# Altium PCB MBHP_CORE_LPC176x-edit.PcbDoc (part 1 of 2)
Units mil, origin at the board's own origin, x right, y up, seen from the top; angles counter-clockwise.
Board outline 4724.41 x 3937.01 mil, 2 copper layers (Top Layer, Bottom Layer), stack 61.855 mil thick; 70 components, 109 nets, 446 pads, 2 vias.
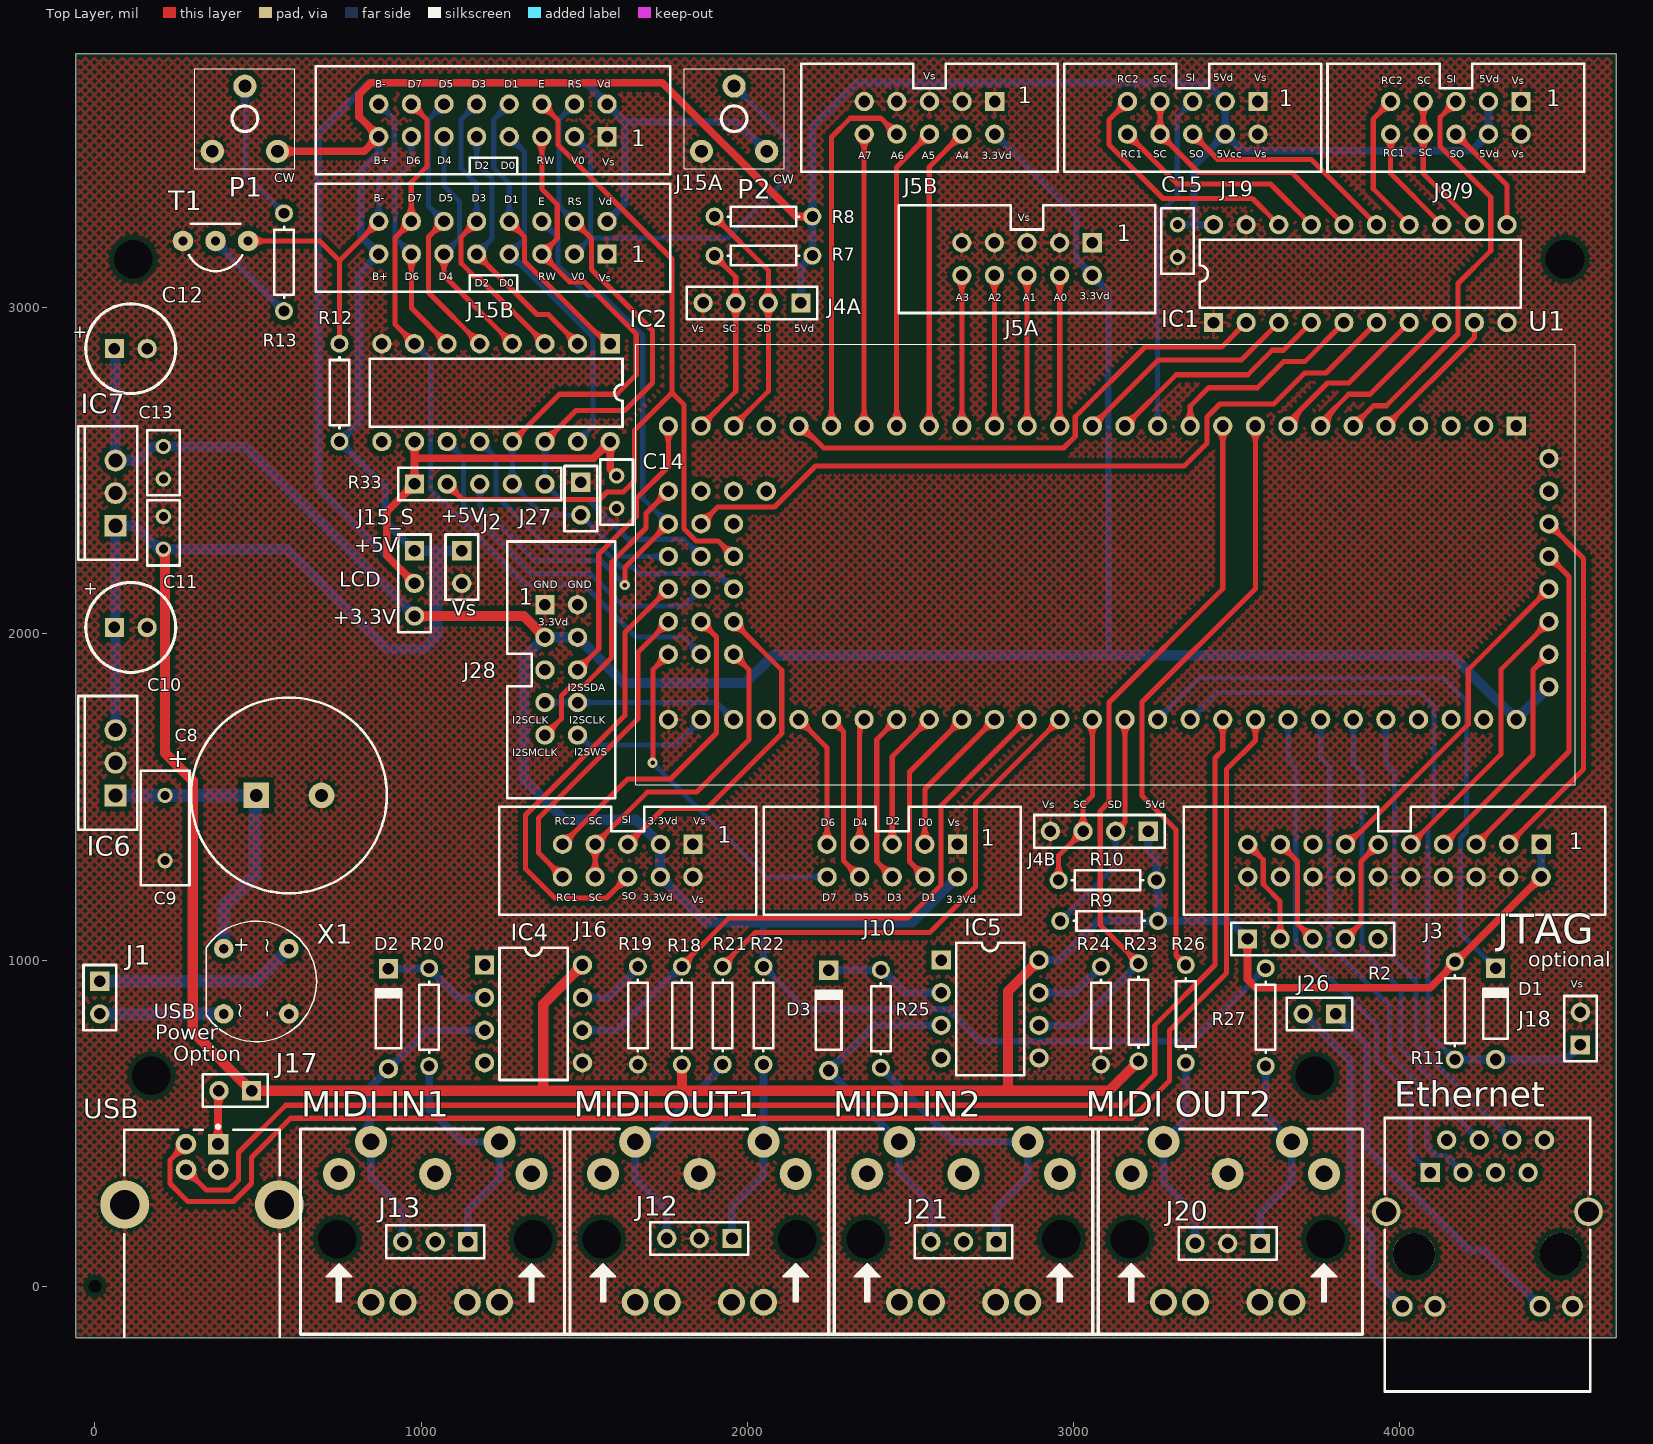
[diagram p0: Top Layer view]
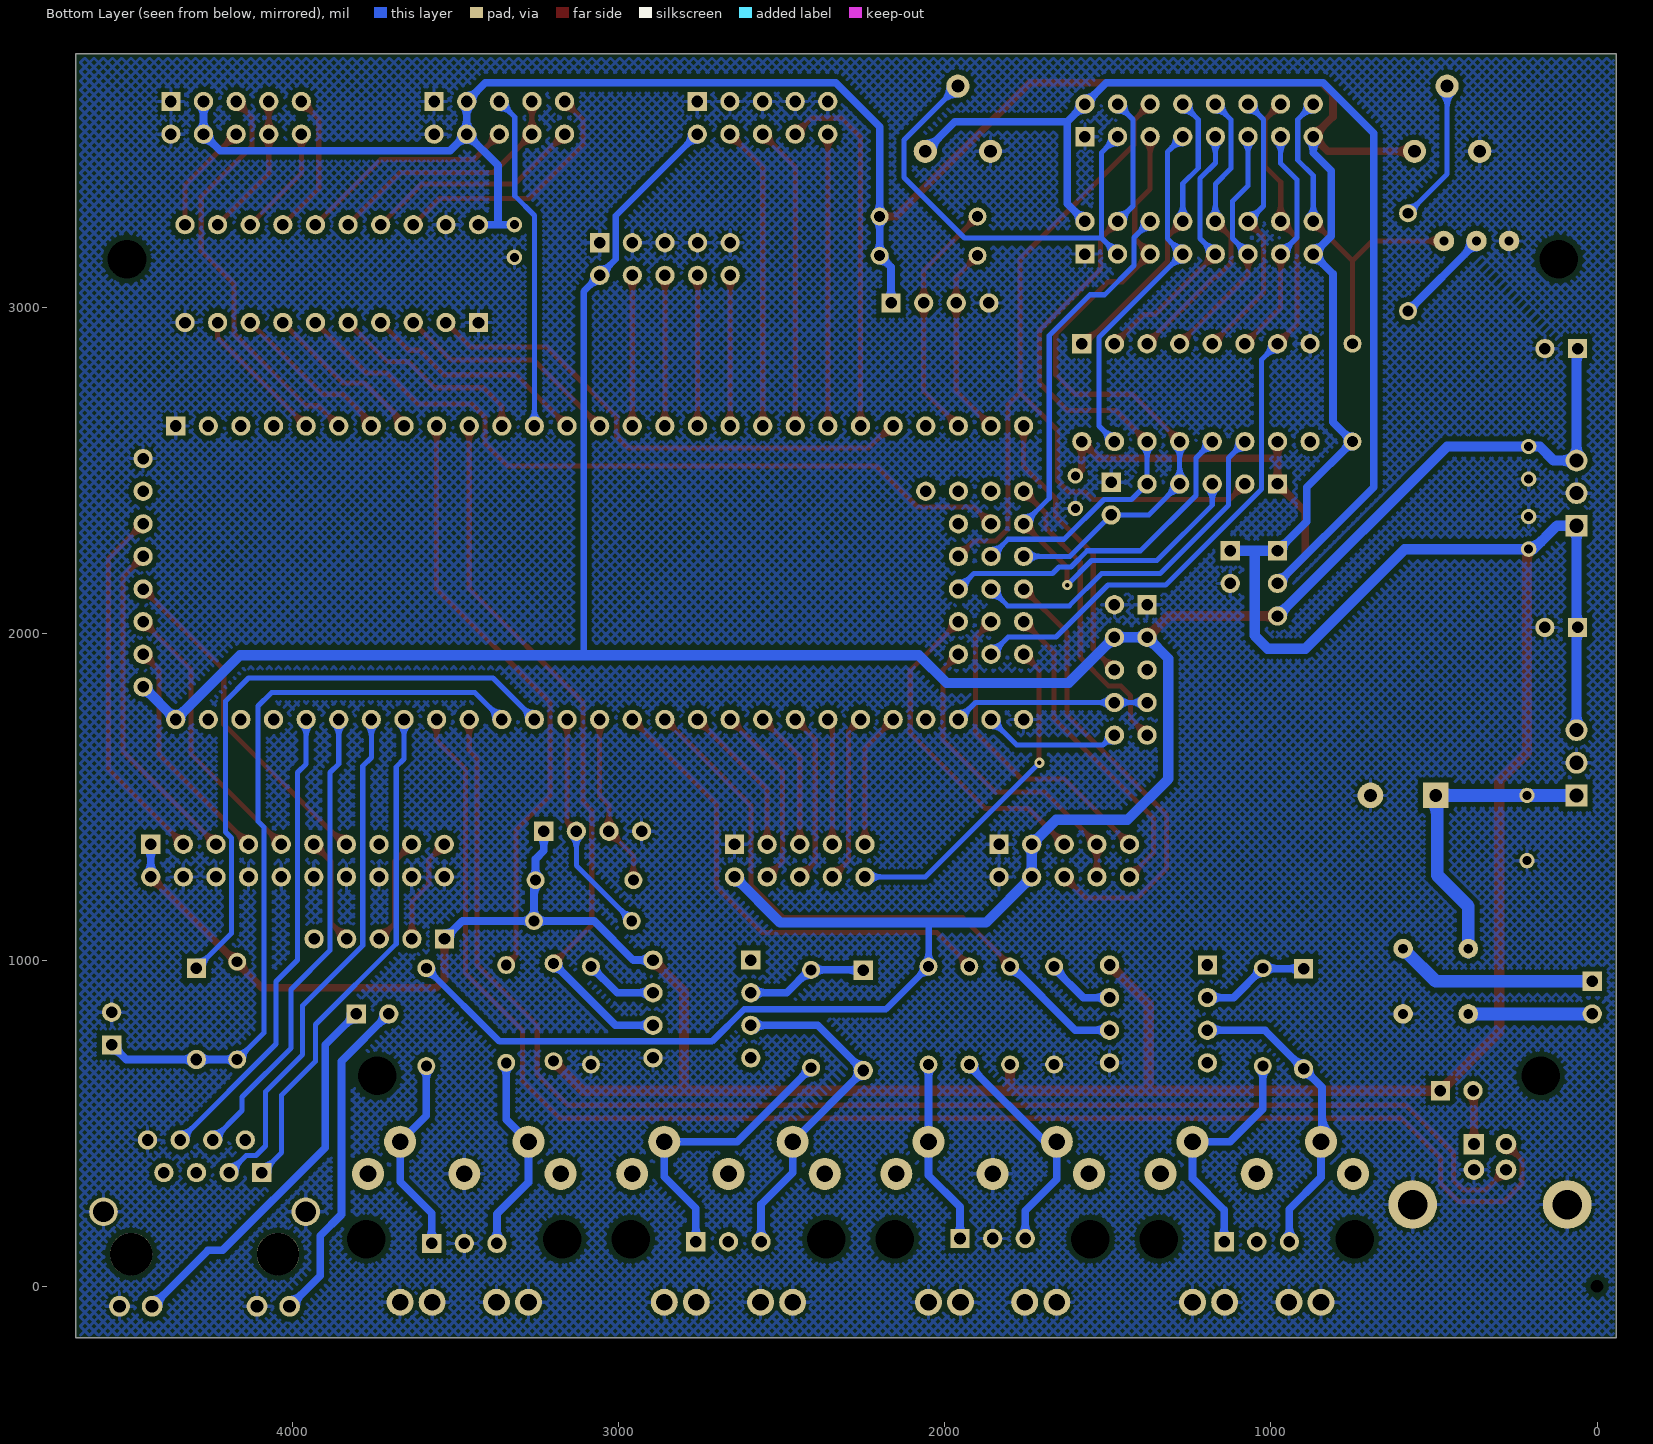
[diagram p1: Bottom Layer view, seen from below]

## Layer stack, top to bottom
Top Solder: solder mask 0.4, Solder Resist, Dk 3.5
Top Layer: signal copper 1.4
Dielectric1: core 59.0551, FR-4, Dk 4.8
Bottom Layer: signal copper 1.4
Bottom Solder: solder mask 0.4, Solder Resist, Dk 3.5

## Board outline
-59.06,-157.48 4665.35,-157.48 4665.35,3779.53 -59.06,3779.53

## Design rules (kind name [scope] priority, off if disabled: settings)
Clearance "Polygon Clearance" [InPolygon] p1: gap=15
ComponentClearance [All] p1: gap=0 collisioncheckmode=3 verticalgap=0 showdistances=FALSE
Height [All] p1: minheight=0 maxheight=1968.5 prefheight=500
HoleSize [All] p1: absolutevalues=TRUE maxlimit=275.59 minlimit=1 maxpercent=80.000 minpercent=20.000
MinimumSolderMaskSliver [All] p1: minsoldermaskwidth=7.09
PolygonConnect [All] p1: connectstyle=Relief reliefconductorwidth=10 reliefentries=4 polygonreliefangle="90 Angle" airgapwidth=10
RoomDefinition MBHP_CORE_LPC17xx [InComponentClass('MBHP_CORE_LPC17xx')] p1: confinementstyle=ConfineIn formatcopy=TRUE lockcomponents=TRUE outline -770,-750 5415,-750 5415,3915 -770,3915
RoutingVias [All] p1: holewidth=13.78 width=31.5 viastyle="Through Hole" minholewidth=11.81 minwidth=27.56 maxholewidth=28 maxwidth=50
SilkToSilkClearance [All] p1: silktosilkclearance=3.94
SilkToSolderMaskClearance SilkscreenOverComponentPads [IsPad] p1: minsilkscreentomaskgap=0 clearancetoexposedcopper=TRUE
SolderMaskExpansion [All] p1: expansion=4
Width [All] p1: maxlimit=157.48 minlimit=9.06 preferedwidth=23.62 minimp=50.000000 maximp=50.000000 favimp=50.000000
24 further rules are at their usual default settings.

## Components (designator, comment, footprint, x,y, rotation, side; value= is the part's Value field where it differs from the comment)
C8 "Cap Pol2" RB5-15 595,1505 r180 top
C9 "Cap2" RAD-0.2 215,1405 r270 top
C10 "Cap Pol2" RB2.54-7 110,2020 r0 top
C11 "Cap2" RAD-0.1 210,2310 r90 top
C12 "Cap Pol2" RB2.54-7 110,2875 r0 top
C13 "Cap2" RAD-0.1 210,2525 r270 top
C14 "Cap2" RAD-0.1 1600,2435 r270 top
C15 "Cap2" RAD-0.1 3320,3205 r270 top
D1 "Diode 1N4148" DO-35 4295,835 r90 top
D2 "1N4148" DO-35A 900,820 r90 top
D3 "1N4148" DO-35A 2250,815 r90 top
Ethernet "RJ45_LEDS" CON_RJ45_RA_LEDS 4269.88,98.43 r0 top
IC1 "SN74HCT541N" N020 3880,3105 r0 top
IC2 "SN74HTC595N" N016 1230,2740 r180 top
IC4 "6N138" DIP-8 1345,835 r270 top
IC5 "6N138" DIP-8 2745,850 r270 top
IC6 "7805" TO220V 62.99,1605 r90 top
IC7 "LF33" TO220V 62.99,2431.77 r90 top
J1 "Power" HDR1X2#1 15,935 r270 top
J2 "" HDR1X2#1 1125,2255 r270 top
J3 "JTAG" "HDR2X10 - big" 3985,1305 r180 top
J4A "IIC1" HDR1X4 2165,3015 r180 top
J4B "IIC2" HDR1X4 3230,1395 r180 top
J5A "Header 5X2" "HDR2X5 - big" 2858.27,3149.61 r180 top
J5B "Header 5X2" "HDR2X5 - big" 2559.06,3582.68 r180 top
J8/9 "Header 5X2" "HDR2X5 - big" 4173.23,3582.68 r180 top
J10 "Header 5X2" "HDR2X5 - big" 2445,1305 r180 top
J12 "Header 3" HDR1X3 1853.54,146.34 r180 top
J13 "Header 3" HDR1X3 1043.54,136.34 r180 top
J15_S "Header 3" HDR1X3 980,2155 r270 top
J15A "LCD1" HDR2X8 1220.47,3575 r0 top
J15B "LCD2" HDR2X8 1220.47,3215 r0 top
J16 "Header 5X2" "HDR2X5 - big" 1633.86,1305 r180 top
J17 "Header 2" HDR1X2#2 480,600 r180 top
J18 "CAN" HDR1X2#1 4555,740 r90 top
J19 "Header 5X2" "HDR2X5 - big" 3366.14,3582.68 r180 top
J20 "Header 3" HDR1X3 3473.54,131.34 r180 top
J21 "Header 3" HDR1X3 2663.54,136.34 r180 top
J26 "LEDs" HDR1X2#1 3805,835 r180 top
J27 "BSL HOLD" HDR1X2#1 1490,2465 r270 top
J28 "Header 5X2" "HDR2X5 - big" 1430,1889.76 r270 top
"MIDI IN1" "MAB-5-SH" MAB-5-SH-2 1043.54,196.85 r0 top
"MIDI IN2" "MAB-5-SH" MAB-5-SH-2 2663.54,196.85 r0 top
"MIDI OUT1" "MAB-5-SH" MAB-5-SH-2 1853.54,196.85 r0 top
"MIDI OUT2" "MAB-5-SH" MAB-5-SH-2 3473.54,196.85 r0 top
P1 "Luminance" CA6V 460,3580 r0 top
P2 "Contrast" CA6V 1960,3580 r0 top
R2 "Resistor Network5" RN1X5 3734.25,1065 r0 top
R7 "Res1 US" AXIAL-0.3 2050,3160 r180 top
R8 "Res1 US" AXIAL-0.3 2050,3280 r180 top
R9 "Res1 US" AXIAL-0.3 3110,1120 r180 top
R10 "Res1 US" AXIAL-0.3 3105,1245 r180 top
R11 "Res1 US" AXIAL-0.3 4170,845 r90 top
R12 "Res1 US" AXIAL-0.3 750,2740 r270 top
R13 "Res1 US" AXIAL-0.3 580,3140 r270 top
R18 "Res1 US" AXIAL-0.3 1800,830 r270 top
R19 "Res1 US" AXIAL-0.3 1665,830 r90 top
R20 "Res1 US" AXIAL-0.3 1025,825 r270 top
R21 "Res1 US" AXIAL-0.3 1925,830 r270 top
R22 "Res1 US" AXIAL-0.3 2050,830 r90 top
R23 "Res1 US" AXIAL-0.3 3200,840 r270 top
R24 "Res1 US" AXIAL-0.3 3085,830 r90 top
R25 "Res1 US" AXIAL-0.3 2410,820 r270 top
R26 "Res1 US" AXIAL-0.3 3345,835 r270 top
R27 "Res1 US" AXIAL-0.3 3590,825 r90 top
R33 "Resistor Network5" RN1X5 1180,2460 r0 top
T1 "BC337" "TO-92 Wide" 370,3205 r90 top
U1 "LPCXpresso1769" "LPCXPRESSO1769 - SMALL" 4358.54,2637.8 r180 top
USB "1-1470156-1" 1-1470156 328.54,-155 r270 top
X1 "Bridge Rectifier" B40C800 495,935 r90 top

## Footprints (in the part's own frame and the unit in brackets; to place one, negate y for a bottom-side part, rotate by r counter-clockwise, add the part's x,y. Pads: shape width x height; smd on the part's side, far side on the other; paste and mask are expansions set on the pad)
1-1470156 [mm] "Connector; USB1.1, Type B, Thru-Hole; 4 Position; Right Angle"
  rect 1.6x1.6 hole 0.92: 1(-15.01,1.25)
  round 1.6 hole 0.92: 2(-15.01,-1.25) 3(-13.01,-1.25) 4(-13.01,1.25)
  round 3.8 hole 2.3: 5(-10.3,6.02) 6(-10.3,-6.02)
  silkscreen extent -16.48,-6.05 -0.02,6.05, body extent -16.07,-6.05 0,6.02, height 12
AXIAL-0.3 [mm] "Resistor; 2 Leads"
  round 1.4 hole 0.85: 1(-3.81,0) 2(3.81,0)
  silkscreen extent -2.77,-0.76 2.77,0.76, body extent -3.4,-1.33 3.6,1.27, height 2.59
B40C800 [mil] "S1B, 1N Package, Shindengen"
  round 60 hole 30: 1(100,100) 2(-100,100) 3(100,-100) 4(-100,-100)
  silkscreen extent -185,-185 185,154, body extent -186,-185 185,154, height 276
CA6V [mm] "PT 15 NV"
  round 1.8 hole 1: 1(2.54,-2.54) 2(-2.54,-2.54) 3(0,2.54)
  silkscreen extent -3.9,-3.9 3.9,3.9, body extent -3.9,-3.9 3.9,3.9, height 4
CON_RJ45_RA_LEDS [mm]
  rect 1.5x1.5 hole 0.9: 1(-4.445,6.35)
  round 1.5 hole 0.9: 2(-3.175,8.89) 3(-1.905,6.35) 4(-0.635,8.89) 5(0.635,6.35) 6(1.905,8.89) 7(3.175,6.35)
  round 1.5 hole 0.9 mask+0: 8(4.445,8.89)
  round 1.62 hole 1: 9(-6.625,-4.06) 11(4.085,-4.06) 12(6.625,-4.06)
  round 1.62 hole 1 mask+0: 10(-4.085,-4.06)
  round 2.23 hole 1.6: MH1(-7.875,3.3) MH2(7.875,3.3)
  round 3.3 hole 3.3 unplated: MH3(-5.715,0) MH4(5.715,0)
  silkscreen extent -8,-10.7 8,10.6, body extent -7.9,-10.71 7.97,10.6, height 13.14
DIP-8 [mm] "DIP; 8 Leads; Row Spacing 7.62 mm; Pitch 2.54 mm"
  rect 1.5x1.5 hole 0.9: 1(-3.81,-3.81)
  round 1.5 hole 0.9: 2(-1.27,-3.81) 3(1.27,-3.81) 4(3.81,-3.81) 5(3.81,3.81) 6(1.27,3.81) 7(-1.27,3.81) 8(-3.81,3.81)
  silkscreen extent -5.15,-2.65 5.15,2.65, body extent -5.09,-2.69 5.2,2.65, height 3.1
DO-35 [mm] "Diode, Axial; Body 3.8 x 1.9 mm (LxDia. max), Lead Dia. 0.53 mm (max)"
  round 1.5 hole 0.9: 1(-3.55,0)
  rect 1.5x1.5 hole 0.9: 2(3.55,0)
  silkscreen extent -1.95,-0.95 2.05,0.95, body extent -2.52,-1.36 2.48,1.24, height 2.59
DO-35A [mm] "Diode, Axial; Body 4.6 x 1.9 mm (LxDia. max), Lead Dia. 0.53 mm (max)"
  round 1.5 hole 0.9: 1(-3.9,0)
  rect 1.5x1.5 hole 0.9: 2(3.9,0)
  silkscreen extent -2.3,-1 2.4,1, body extent -2.63,-1.29 2.37,1.3, height 2.59
HDR1X2#1 [mm]
  rect 1.5x1.5 hole 0.9: 1(0,0)
  round 1.5 hole 0.9: 2(2.54,0)
  silkscreen extent -1.27,-1.27 3.81,1.27, body extent -1.27,-1.27 3.81,1.27, height 8.41
HDR1X2#2 [mm]
  rect 1.5x1.5 hole 0.9: 1(-0.01,0.007)
  round 1.5 hole 0.9: 2(2.53,0.007)
  silkscreen extent -1.28,-1.26 3.8,1.28, body extent -1.28,-1.26 3.8,1.28, height 8.41
HDR1X3 [mm] "Connector; Header; 3 Position"
  rect 1.5x1.5 hole 0.9: 1(-2.54,0)
  round 1.5 hole 0.9: 2(0,0) 3(2.54,0)
  silkscreen extent -3.81,-1.27 3.81,1.27
HDR1X4 [mm] "Connector; Header; 4 Position"
  rect 1.5x1.5 hole 0.9: 1(0,0)
  round 1.5 hole 0.9: 2(2.54,0) 3(5.08,0) 4(7.62,0)
  silkscreen extent -1.27,-1.27 8.89,1.27, body extent -1.27,-1.32 8.91,1.22, height 8.41
"HDR2X5 - big" [mm] "Connector; Header; 5x2 Position"
  rect 1.5x1.5 hole 0.9: 1(-5.08,-1.27)
  round 1.5 hole 0.9: 2(-5.08,1.27) 3(-2.54,-1.27) 4(-2.54,1.27) 5(0,-1.27) 6(0,1.27) 7(2.54,-1.27) 8(2.54,1.27) 9(5.08,-1.27) 10(5.08,1.27)
  silkscreen extent -10,-4.2 10,4.2, body extent -9.97,-4.25 10.02,4.18, height 10
HDR2X8 [mm] "Connector; Header; 8x2 Position"
  round 1.5 hole 0.9: 1(-8.89,-1.27) 2(-8.89,1.27) 3(-6.35,-1.27) 4(-6.35,1.27) 5(-3.81,-1.27) 6(-3.81,1.27) 7(-1.27,-1.27) 8(-1.27,1.27) 9(1.27,-1.27) 10(1.27,1.27) 11(3.81,-1.27) 12(3.81,1.27) 13(6.35,-1.27) 14(6.35,1.27) 16(8.89,1.27)
  rect 1.5x1.5 hole 0.9: 15(8.89,-1.27)
  silkscreen extent -13.8,-4.2 13.8,4.2, body extent -10.1,-2.49 10.23,2.59, height 8.41
"HDR2X10 - big" [mm] "Connector; Header; 10x2 Position"
  rect 1.5x1.5 hole 0.9: 1(-11.43,-1.27)
  round 1.5 hole 0.9: 2(-11.43,1.27) 3(-8.89,-1.27) 4(-8.89,1.27) 5(-6.35,-1.27) 6(-6.35,1.27) 7(-3.81,-1.27) 8(-3.81,1.27) 9(-1.27,-1.27) 10(-1.27,1.27) 11(1.27,-1.27) 12(1.27,1.27) 13(3.81,-1.27) 14(3.81,1.27) 15(6.35,-1.27) 16(6.35,1.27) 17(8.89,-1.27) 18(8.89,1.27) 19(11.43,-1.27) 20(11.43,1.27)
  silkscreen extent -16.4,-4.2 16.4,4.2, body extent -16.4,-4.2 16.42,4.2, height 10
"LPCXPRESSO1769 - SMALL" [mm]
  rect 1.5x1.5 hole 0.9: 1(0,0)
  round 1.5 hole 0.9: 2(2.54,0) 3(5.08,0) 4(7.62,0) 5(10.16,0) 6(12.7,0) 7(15.24,0) 8(17.78,0) 9(20.32,0) 10(22.86,0) 11(25.4,0) 12(27.94,0) 13(30.48,0) 14(33.02,0) 15(35.56,0) 16(38.1,0) 17(40.64,0) 18(43.18,0) 19(45.72,0) 20(48.26,0) 21(50.8,0) 22(53.34,0) 23(55.88,0) 24(58.42,0) 25(60.96,0) 26(63.5,0) 27(66.04,0) 28(0,22.86) 29(2.54,22.86) 30(5.08,22.86) 31(7.62,22.86) 32(10.16,22.86) 33(12.7,22.86) 34(15.24,22.86) 35(17.78,22.86) 36(20.32,22.86) 37(22.86,22.86) 38(25.4,22.86) 39(27.94,22.86) 40(30.48,22.86) 41(33.02,22.86) 42(35.56,22.86) 43(38.1,22.86) 44(40.64,22.86) 45(43.18,22.86) 46(45.72,22.86) 47(48.26,22.86) 48(50.8,22.86) 49(53.34,22.86) 50(55.88,22.86) 51(58.42,22.86) 52(60.96,22.86) 53(63.5,22.86) 54(66.04,22.86) 55(-2.54,20.32) 56(-2.54,17.78) 57(-2.54,15.24) 58(-2.54,12.7) 59(-2.54,10.16) 60(-2.54,7.62) 61(-2.54,5.08) 62(-2.54,2.54) 63(58.42,5.08) 64(60.96,5.08) 65(63.5,5.08) 66(66.04,5.08) 67(60.96,7.62) 68(63.5,7.62) 69(66.04,7.62) 70(60.96,10.16) 71(63.5,10.16) 72(66.04,10.16) 73(60.96,12.7) 74(63.5,12.7) 75(66.04,12.7) 76(60.96,15.24) 77(63.5,15.24) 78(66.04,15.24) 79(60.96,17.78) 80(63.5,17.78) 81(66.04,17.78)
  silkscreen extent -4.6,-6.35 68.58,27.94, body extent -4.6,-6.35 68.58,27.94, height 7
MAB-5-SH-2 [mm]
  round 0 hole 3 unplated: 0(-7.62,-1.33) 0(7.62,-1.33)
  round 2.5 hole 1.3: 1(7.5,3.75) 2(0,3.75) 3(-7.5,3.75) 4(5,6.25) 5(-5,6.25)
  round 2.1 hole 1.3: MH1(2.5,-6.25) MH1(5,-6.25) MH2(-5,-6.25) MH2(-2.5,-6.25)
  silkscreen extent -10.5,-8.75 10.5,7.25, body extent -10.34,-8.95 10.36,7.31, height 21.4
N016 [mm] "DIP; 16 Leads; Row Spacing 7.62 mm; Pitch 2.54 mm"
  rect 1.5x1.5 hole 0.9: 1(-8.89,-3.81)
  round 1.5 hole 0.9: 2(-6.35,-3.81) 3(-3.81,-3.81) 4(-1.27,-3.81) 5(1.27,-3.81) 6(3.81,-3.81) 7(6.35,-3.81) 8(8.89,-3.81) 9(8.89,3.81) 10(6.35,3.81) 11(3.81,3.81) 12(1.27,3.81) 13(-1.27,3.81) 14(-3.81,3.81) 15(-6.35,3.81) 16(-8.89,3.81)
  silkscreen extent -9.85,-2.65 9.85,2.65, body extent -9.79,-2.67 9.8,2.67, height 3.1
N020 [mm] "DIP; 20 Leads; Row Spacing 7.62 mm; Pitch 2.54 mm"
  rect 1.5x1.5 hole 0.9: 1(-11.43,-3.81)
  round 1.5 hole 0.9: 2(-8.89,-3.81) 3(-6.35,-3.81) 4(-3.81,-3.81) 5(-1.27,-3.81) 6(1.27,-3.81) 7(3.81,-3.81) 8(6.35,-3.81) 9(8.89,-3.81) 10(11.43,-3.81) 11(11.43,3.81) 12(8.89,3.81) 13(6.35,3.81) 14(3.81,3.81) 15(1.27,3.81) 16(-1.27,3.81) 17(-3.81,3.81) 18(-6.35,3.81) 19(-8.89,3.81) 20(-11.43,3.81)
  silkscreen extent -12.5,-2.65 12.5,2.65, body extent -12.44,-2.67 12.5,2.67, height 3.1
RAD-0.1 [mm] "Indicating Instrument; 2 Leads"
  round 1.2 hole 0.7: 1(-1.27,0) 2(1.27,0)
  silkscreen extent -2.54,-1.27 2.54,1.27, body extent -2.54,-1.27 2.54,1.27, height 7
RAD-0.2 [mm] "Radial Cap, Thru-Hole; 2 Leads; 0.2 in Pin Spacing"
  round 1.2 hole 0.7: 1(-2.54,0) 2(2.54,0)
  silkscreen extent -4.44,-1.91 4.44,1.91
RB2.54-7 [mm] "Motor, General Kind; 2 Leads"
  rect 1.5x1.5 hole 0.9: 1(-1.27,0)
  round 1.5 hole 0.9: 2(1.27,0)
  silkscreen extent -3.5,-3.5 3.5,3.5, body extent -3.57,-3.39 3.4,3.59, height 10
RB5-15 [mm] "Polarized Capacitor (Radial); 2 Leads"
  rect 2x2 hole 1: 1(2.54,0)
  round 2 hole 1: 2(-2.54,0)
  silkscreen extent -7.62,-7.62 7.62,7.62, body extent -7.48,-7.46 7.46,7.52, height 10
RN1X5 [mm] "Resistor net; 5 Pins"
  rect 1.5x1.5 hole 0.9: 1(-5.08,0)
  round 1.5 hole 0.9: 2(-2.54,0) 3(0,0) 4(2.54,0) 5(5.08,0)
  silkscreen extent -6.35,-1.27 6.35,1.27, body extent -6.35,-0.95 6.38,1.02, height 6
TO220V [mm] "TO, Thru-Hole, Vertical, Heatsink Mounted; 3 In-Line Leads; Pitch 2.54 mm; Pin sequence 1, 3, 2"
  rect 1.7x1.7 hole 1.1: 1(-2.54,0)
  round 1.7 hole 1.1: 2(2.54,0) 3(0,0)
  silkscreen extent -5.2,-1.7 5.2,2.9, body extent -5.37,-1.84 5.34,2.96, height 17
"TO-92 Wide" [mm] "TO, Flat Index; 3 In-Line, Axial Leads; Body Dia. 4.6mm; Leads 0.41 x 0.39 mm (max)"
  round 1.6 hole 0.7: 1(0,2.54) 2(0,0) 3(0,-2.54)
  silkscreen extent -2.34,-2.07 1.35,2.07, body extent -2.21,-2.47 1.48,2.33, height 8

## Part data
C8 C10 C12: "Polarized Capacitor (Axial)"
C9 C11 C13 C14 C15: "Capacitor"
D1: "High Conductance Fast Diode"
D2 D3: library part "Diode 1N4148", "High Conductance Fast Diode"
Ethernet: library part CON_RJ45_RA_LEDS, "Socket, 1x1 Tab-DOWN R/A 8-Way RJ45"
IC1: "Octal Buffer and Line Driver with 3-State Outputs"
IC2: "8-Bit Shift Register with 3-State Output Registers"
IC6 IC7: library part L7812CV, "Positive Voltage Regulator"
J1 J2 J18 J26 J27: library part "Header 2", "Header, 2-Pin"
J3: library part "Header 10X2", "Header, 10-Pin, Dual row"
J4A J4B: library part "Header 4", "Header, 4-Pin"
J5A J5B J8/9 J10 J16 J19 J28: "Header, 5-Pin, Dual row"
J12 J13 J15_S J20 J21: "Header, 3-Pin"
J15A J15B: library part "Header 8X2", "Header, 8-Pin, Dual row"
J17: "Header, 2-Pin"
"MIDI IN1" "MIDI IN2" "MIDI OUT1" "MIDI OUT2": "Socket, 5-way R/A DIN"
P1 P2: library part RPot, "Potentiometer"
R2 R33: library part "Resistor Network_5"
R7 R8 R9 R10 R11 R12 R13 R18 R19 R20 R21 R22 R23 R24 R25 R26 R27: "Resistor"
T1: library part BC550, "NPN General Purpose Amplifier"
USB: "USB 1.1, Right Angle, Thru-Hole, B Type, Receptacle, 4 Position, White"

## Free pads (board coordinates)
  rect 0x0 hole 39.37 unplated: 0(0,0)
  round 0 hole 118.11 unplated: 0(173.54,645) 1(3741.04,645) 2(118.11,3149.61) 3(4507.87,3149.61)

## Via types
v1: diameter 31.5, hole 13.78, Top Layer to Bottom Layer, 2 vias

## Nets (pads, with @x,y where several pads share a name; then routed paths per layer and width w, separated by ;. In a path a pad name is that pad's centre, name@x,y a point inside that pad or via, vN(x,y) a via of type N, cw(c..) or ccw(c..) an arc to the next point about the centre after c; other vN are vias at no path point)
3.3VCC: C12.1 C13.1 IC7.2 J5A.2 J5B.2 J10.2 J15_S.3 J16.3 J16.4 J28.3 J28.4 R22.2 R27.2 U1.28 U1.55 | length 12290
  Top Layer w31.5: J15_S.3@980,2055 1314.76,2055 J28.3@1380,1989.76 ; J15_S.3@989.74,2045.26 cw(c1013.27,2021.73) 1013.27,2055 cw(c1013.27,2088.27) J15_S.3@989.74,2064.74 ; J28.3@1366.22,1989.76 ccw(c1332.95,1989.76) 1356.48,2013.29 ccw(c1380,2036.81) J28.3@1380,2003.54
  Bottom Layer w19.68: R22.2@2037.47,992.53 ccw(c2007.23,1022.77) 2050,1022.77 ccw(c2092.77,1022.77) R22.2@2062.53,992.53 ; R22.2@2050,962.28 cw(c2050,919.51) 2080.24,949.76 cw(c2110.49,980) R22.2@2067.72,980 ; 2050,1115 R22.2@2050,980 2180.63,849.37 2615.45,849.37 2714.19,750.63 3365.63,750.63 R27.2@3590,975 R27.2@3584.88,980.12 ; J5B.2@2759.06,3512.99 cw(c2759.06,3465.47) 2792.66,3499.07 cw(c2826.26,3532.68) J5B.2@2778.74,3532.68 ; J5B.2@2759.06,3532.68 3008.9,3282.83 3008.9,3148.98 J5A.2@3058.27,3099.61 3107.91,3049.96 3107.91,1940 ; J5A.2@3038.58,3099.61 ccw(c2991.06,3099.61) 3024.66,3133.21 ccw(c3058.27,3166.82) J5A.2@3058.27,3119.29 ; J5A.2@3058.27,3079.92 cw(c3058.27,3032.4) 3091.87,3066 cw(c3125.48,3099.61) J5A.2@3077.95,3099.61 ; R27.2@3572.28,975 cw(c3529.51,975) 3559.76,944.76 cw(c3590,914.51) R27.2@3590,957.28
  Bottom Layer w31.5: C12.1@50.26,2865.26 cw(c19.51,2834.51) 62.99,2834.51 ; IC7.2@50.46,2544.3 ccw(c20.22,2574.54) 62.99,2574.54 ccw(c105.76,2574.54) 75.52,2544.3 ccw(c105.76,2574.54) 105.76,2531.77 ccw(c105.76,2489) IC7.2@75.52,2519.24 ; C12.1@62.99,2874.02 IC7.2@62.99,2531.77 132.56,2531.77 175.79,2575 C13.1@210,2575 460,2575 J15_S.3@980,2055 ; J15_S.3@966.22,2055 ccw(c932.95,2055) 956.48,2078.52 ccw(c980,2102.05) J15_S.3@980,2068.78 ; J28.3@1366.22,1989.76 cw(c1332.95,1989.76) 1356.48,1966.24 cw(c1380,1942.72) J28.3@1380,1975.98 ; J28.3@1389.74,1980.02 cw(c1413.27,1956.5) 1413.27,1989.76 cw(c1413.27,2023.03) J28.3@1389.74,1999.51 ; J28.4@1470.26,1980.02 ccw(c1446.73,1956.5) 1446.73,1989.76 ccw(c1446.73,2023.03) J28.4@1470.26,1999.51 ; J28.4@1480,1975.98 cw(c1480,1942.72) 1503.52,1966.24 cw(c1527.05,1989.76) J28.4@1493.78,1989.76 ; J16.3@1720.08,1355 ccw(c1686.81,1355) 1710.34,1378.52 ccw(c1733.86,1402.05) J16.3@1733.86,1368.78 ; J16.4@1724.11,1264.74 ccw(c1700.59,1288.27) 1733.86,1288.27 ccw(c1767.12,1288.27) J16.4@1743.6,1264.74 ; J16.3@1724.11,1345.26 cw(c1700.59,1321.73) 1733.86,1321.73 cw(c1767.12,1321.73) J16.3@1743.6,1345.26 ; J16.4@1733.86,1241.22 cw(c1733.86,1207.95) 1757.38,1231.48 cw(c1780.9,1255) J16.4@1747.64,1255 ; J10.2@2631.22,1255 cw(c2597.95,1255) 2621.48,1231.48 cw(c2645,1207.95) J10.2@2645,1241.22 ; J10.2@2645,1255 2505,1115 2050,1115 1873.86,1115 J16.4@1733.86,1255 J16.3@1733.86,1355 1658.86,1430 1440,1430 1315,1555 1315,1924.76 J28.3@1380,1989.76 J28.4@1480,1989.76 1619.76,1850 1995,1850 2080,1935 4161.34,1935 U1.28@4358.54,1737.8 U1.55@4458.54,1837.8 ; U1.28@4344.76,1737.8 ccw(c4311.5,1737.8) 4335.02,1761.32 ccw(c4358.54,1784.84) 4358.54,1751.57 ccw(c4358.54,1784.84) 4382.07,1761.32 ccw(c4405.59,1737.8) U1.28@4372.32,1737.8 ; U1.55@4444.76,1837.8 cw(c4411.5,1837.8) 4435.02,1814.27 cw(c4458.54,1790.75) U1.55@4458.54,1824.02
5VCC: C10.1 C11.1 C15.1 IC1.20 IC4.8 IC5.8 IC6.2 IC7.1 J2.1 J3.1 J3.2 J4A.1 J4B.1 J8/9.3 J8/9.4 J15_S.1 J15A.1 J15B.1 J17.1 J19.3 J19.4 P1.1 R2.1 R7.1 R8.1 R9.1 R10.1 R11.2 R12.2 R18.2 R23.2 | length 19993.3
  Top Layer w23.62: P1.1@560,3480 825.47,3480 J15A.1@870.47,3525 810,3585.47 810,3655 845,3690 1740,3690 2150,3280 R8.1@2200,3280 ; P1.1@576.7,3463.3 cw(c617.03,3422.97) 617.03,3480 cw(c617.03,3537.03) P1.1@576.7,3496.7 ; J15A.1@870.47,3507.28 ccw(c870.47,3464.51) 840.23,3494.76 ccw(c809.98,3525) 852.76,3525 ccw(c809.98,3525) 840.23,3555.24 ccw(c870.47,3585.49) J15A.1@870.47,3542.72 ; R8.1@2188.86,3268.86 ccw(c2161.98,3241.98) 2161.98,3280 ccw(c2161.98,3318.02) R8.1@2188.86,3291.14 ; R2.1@3521.72,1052.47 cw(c3491.48,1022.23) 3534.25,1022.23 cw(c3577.02,1022.23) R2.1@3546.78,1052.47 ; R2.1@3534.25,1065 3534.25,940.75 3560,915 4095,915 J3.2@4435,1255 ; 4139.58,959.58 ccw(c4104.16,995) R11.2@4154.25,995 ; 4151.65,971.65 cw(c4170,953.3) R11.2@4170,979.25 ; R11.2@4170,1010.75 ccw(c4170,1060.84) 4205.42,1025.42 ; R11.2@4185.75,995 cw(c4211.7,995) 4193.35,1013.35 ; J3.2@4417.28,1255 cw(c4374.51,1255) 4404.76,1224.76 cw(c4435,1194.51) J3.2@4435,1237.28
  Top Layer w31.5: C11.1@204.43,2254.43 cw(c178.25,2228.25) 215.28,2228.25 ; C11.1@210,2260 215.28,2254.72 215.28,1634.72 300,1550 300,779.71 480,599.71 J17.1@480.38,599.71 1370,599.71 ; J17.1@456.21,623.5 ccw(c480.38,647.67) J17.1@480.38,613.49 ; J17.1@457.12,622.59 cw(c434.24,599.71) J17.1@466.6,599.71 ; J17.1@490.12,589.97 cw(c513.64,566.44) 513.64,599.71 cw(c513.64,632.98) J17.1@490.12,609.45 ; IC4.8@1481.22,985 cw(c1447.95,985) 1471.48,961.48 cw(c1495,937.95) IC4.8@1495,971.22 ; IC4.8@1495,985 1375,865 1375,604.71 1370,599.71 ; R18.2@1791.65,671.65 cw(c1771.49,651.49) 1800,651.49 cw(c1828.51,651.49) R18.2@1808.35,671.65 ; R18.2@1800,680 1800,604.71 1795,599.71 ; IC5.8@2881.22,1000 cw(c2847.95,1000) 2871.48,976.48 cw(c2895,952.95) IC5.8@2895,986.22 ; IC5.8@2895,1000 2800,905 2800,599.71 ; R23.2@3188.19,690 cw(c3159.67,690) 3179.84,669.84 cw(c3200,649.67) R23.2@3200,678.19 ; R23.2@3200,690 3109.71,599.71 2800,599.71 ; 1370,599.71 1795,599.71 ; 1795,599.71 2800,599.71
  Bottom Layer w23.62: R12.2@750,2574.25 cw(c750,2536.23) 776.88,2563.12 cw(c803.77,2590) 765.75,2590 cw(c803.77,2590) 776.88,2616.88 cw(c750,2643.77) R12.2@750,2605.75 ; J15A.1@857.94,3512.47 cw(c827.7,3482.23) 870.47,3482.23 cw(c913.24,3482.23) J15A.1@883,3512.47 ; J15B.1@870.47,3147.28 ccw(c870.47,3104.51) 840.23,3134.76 ccw(c809.98,3165) 852.76,3165 ccw(c809.98,3165) 840.23,3195.24 ccw(c870.47,3225.49) J15B.1@870.47,3182.72 ; J15A.1@870.47,3525 870.47,3475.47 815,3420 815,3220.47 J15B.1@870.47,3165 810,3104.53 810,2650 R12.2@750,2590 890,2450 890,2345 J15_S.1@980,2255 ; J15_S.1@962.28,2255 ccw(c919.51,2255) 949.76,2285.24 ccw(c980,2315.49) J15_S.1@980,2272.72 ; 1010,1955 1010,1960 ; J4A.1@2152.47,3027.53 ccw(c2122.23,3057.77) 2165,3057.77 ccw(c2207.77,3057.77) J4A.1@2177.53,3027.53 ; J4A.1@2165,3015 2165,3125 R7.1@2200,3160 R8.1@2200,3280 2200,3555 2335,3690 3408.82,3690 J19.3@3466.14,3632.68 J19.4@3466.14,3532.68 ; R7.1@2184.25,3160 cw(c2146.23,3160) 2173.12,3133.12 cw(c2200,3106.23) R7.1@2200,3144.25 ; R7.1@2188.86,3171.14 ccw(c2161.98,3198.02) 2200,3198.02 ccw(c2238.02,3198.02) R7.1@2211.14,3171.14 ; R8.1@2188.86,3268.86 cw(c2161.98,3241.98) 2200,3241.98 cw(c2238.02,3241.98) R8.1@2211.14,3268.86 ; R8.1@2188.86,3291.14 ccw(c2161.98,3318.02) 2200,3318.02 ccw(c2238.02,3318.02) R8.1@2211.14,3291.14 ; IC5.8@2895,1005 IC5.8@2895,1000 2955,1000 3075,1120 R9.1@3260,1120 ; IC5.8@2907.53,987.47 cw(c2937.77,957.23) 2937.77,1000 cw(c2937.77,1042.77) IC5.8@2907.53,1012.53 ; J4B.1@3217.47,1382.47 cw(c3187.23,1352.23) 3230,1352.23 cw(c3272.77,1352.23) J4B.1@3242.53,1382.47 ; J4B.1@3230,1395 3230,1335 3255,1310 R10.1@3255,1245 3260,1240 R9.1@3260,1120 ; R10.1@3243.86,1233.86 cw(c3204.91,1194.91) 3260,1194.91 ; R10.1@3243.86,1256.14 ccw(c3216.98,1283.02) 3255,1283.02 ccw(c3293.02,1283.02) R10.1@3266.14,1256.14 ; R9.1@3248.86,1108.86 ccw(c3221.98,1081.98) 3221.98,1120 ccw(c3221.98,1158.02) 3248.86,1131.14 ccw(c3221.98,1158.02) 3260,1158.02 ccw(c3298.02,1158.02) 3271.14,1131.14 ccw(c3298.02,1158.02) 3298.02,1120 ccw(c3298.02,1081.98) R9.1@3271.14,1108.86 ; C15.1@3320,3255 IC1.20@3430,3255 ; 3370,3260.24 3370,3436.54 J19.4@3466.14,3532.68 ; J19.4@3448.43,3532.68 cw(c3405.65,3532.68) 3435.9,3502.43 cw(c3466.14,3472.19) 3466.14,3514.96 cw(c3466.14,3472.19) 3496.39,3502.43 cw(c3526.63,3532.68) J19.4@3483.86,3532.68 ; J19.3@3448.43,3632.68 ccw(c3405.65,3632.68) 3435.9,3662.92 ccw(c3466.14,3693.17) J19.3@3466.14,3650.39 ; J19.4@3453.61,3545.2 ccw(c3423.37,3575.45) 3466.14,3575.45 ccw(c3508.91,3575.45) J19.4@3478.67,3545.2 ; J19.3@3453.61,3620.15 cw(c3423.37,3589.91) 3466.14,3589.91 cw(c3508.91,3589.91) J19.3@3478.67,3620.15 ; R2.1@3516.54,1065 ccw(c3473.76,1065) 3504.01,1095.24 ccw(c3534.25,1125.49) R2.1@3534.25,1082.72 ; R2.1@3534.25,1065 3479.25,1120 R9.1@3260,1120 ; J8/9.4@4255.51,3532.68 cw(c4212.74,3532.68) 4242.98,3502.43 cw(c4273.23,3472.19) J8/9.4@4273.23,3514.96 ; J8/9.4@4260.7,3545.2 ccw(c4230.46,3575.45) 4273.23,3575.45 ccw(c4316,3575.45) J8/9.4@4285.76,3545.2 ; J8/9.3@4260.7,3620.15 cw(c4230.46,3589.91) 4273.23,3589.91 cw(c4316,3589.91) J8/9.3@4285.76,3620.15 ; J8/9.3@4273.23,3632.68 J8/9.4@4273.23,3532.68 4221.89,3481.34 3517.48,3481.34 J19.4@3466.14,3532.68 ; J3.2@4422.47,1267.53 ccw(c4392.23,1297.77) 4435,1297.77 ccw(c4477.77,1297.77) J3.2@4447.53,1267.53 ; J3.1@4422.47,1342.47 cw(c4392.23,1312.23) 4435,1312.23 cw(c4477.77,1312.23) J3.1@4447.53,1342.47 ; J3.2@4435,1255 J3.1@4435,1355
  Bottom Layer w31.5: C10.1@50.26,2010.26 cw(c19.51,1979.51) 62.99,1979.51 ; C10.1@50.26,2029.74 ccw(c19.51,2060.49) 62.99,2060.49 ; IC6.2@50.46,1717.53 ccw(c20.22,1747.77) 62.99,1747.77 ccw(c105.76,1747.77) IC6.2@75.52,1717.53 ; IC7.1@50.46,2319.24 cw(c20.22,2289) 62.99,2289 cw(c105.76,2289) 75.52,2319.24 cw(c105.76,2289) 105.76,2331.77 cw(c105.76,2374.54) IC7.1@75.52,2344.3 ; IC6.2@62.99,1705 IC7.1@62.99,2331.77 123.23,2331.77 195,2260 C11.1@210,2260 ; 170.95,2284.05 ccw(c210,2323.1) C11.1@210,2267.87 ; C11.1@207.8,2262.2 C11.1@210,2260 ; J15_S.1@980,2255 1050,2255 ; J15_S.1@989.74,2245.26 cw(c1013.27,2221.73) 1013.27,2255 cw(c1013.27,2288.27) J15_S.1@989.74,2264.74 ; J2.1@1115.26,2245.26 ccw(c1091.73,2221.73) 1091.73,2255 ccw(c1091.73,2288.27) J2.1@1115.26,2264.74 ; J2.1@1125,2255 1050,2255 ; C11.1@210,2260 590,2260 895,1955 1010,1955 1050,1995 1050,2255
B: J15A.2 J15B.2 R12.1 T1.3 | length 1465.1
  Top Layer w15.75: T1.3@470,3205 689.53,3205 750,3144.53 ; T1.3@486.7,3188.3 cw(c527.03,3147.97) 527.03,3205 cw(c527.03,3262.03) T1.3@486.7,3221.7 ; R12.1@750,2890 750,3144.53 ; J15B.2@848.82,3265 cw(c796.54,3265) 833.51,3228.04 cw(c870.47,3191.07) J15B.2@870.47,3243.35 ; J15B.2@870.47,3265 750,3144.53
  Bottom Layer w15.75: J15B.2@855.16,3280.31 ccw(c818.2,3317.28) 870.47,3317.28 ccw(c922.75,3317.28) J15B.2@885.78,3280.31 ; J15B.2@870.47,3265 870.47,3405.47 917.87,3452.87 917.87,3577.6 J15A.2@870.47,3625 ; J15A.2@870.47,3603.35 cw(c870.47,3551.07) 907.44,3588.04 cw(c944.4,3625) J15A.2@892.13,3625
C: J15A.13 J15B.13 P2.3 | length 1699.9
  Bottom Layer w15.75: J15B.13@1470.47,3165 1520,3214.53 ; J15B.13@1470.47,3186.65 ccw(c1470.47,3238.93) 1507.44,3201.96 ccw(c1544.4,3165) J15B.13@1492.13,3165 ; J15A.13@1470.47,3503.35 cw(c1470.47,3451.07) 1507.44,3488.04 cw(c1544.4,3525) J15A.13@1492.13,3525 ; J15A.13@1470.47,3525 1520,3475.47 1520,3214.53 ; P2.3@1960,3652.44 cw(c1960,3585.91) 2007.05,3632.95 cw(c2054.09,3680) P2.3@1987.56,3680 ; P2.3@1960,3680 2125,3515 2125,3400 1939.53,3214.53 1520,3214.53
GND: "MIDI IN1.MH1" "MIDI IN1.MH2" "MIDI IN2.MH1" "MIDI IN2.MH2" "MIDI OUT1.2" "MIDI OUT1.MH1" "MIDI OUT1.MH2" "MIDI OUT2.2" "MIDI OUT2.MH1" "MIDI OUT2.MH2" C8.2 C9.2 C10.2 C11.2 C12.2 C13.2 C14.2 C15.2 Ethernet.8 Ethernet.10 Ethernet.12 Ethernet.MH1 Ethernet.MH2 IC1.1 IC1.10 IC1.19 IC2.8 IC4.5 IC5.5 IC6.3 IC7.3 J2.2 J3.4 J3.6 J3.8 J3.10 J3.12 J3.14 J3.16 J3.18 J3.20 J4A.4 J4B.4 J5A.1 J5A.3 J5A.5 J5A.7 J5A.9 J5B.1 J5B.3 J5B.5 J5B.7 J5B.9 J8/9.1 J8/9.2 J10.1 J12.2 J15A.15 J15B.15 J16.1 J16.2 J18.2 J19.1 J19.2 J20.2 J27.1 J28.1 J28.2 P1.2 P2.2 R19.1 R24.1 T1.1 U1.1 U1.54 U1.62 USB.4 USB.5 USB.6 X1.4
MISO: IC1.15 J19.6 | length 761
  Top Layer w15.75: J19.6@3366.14,3511.02 cw(c3366.14,3458.75) 3403.11,3495.71 cw(c3440.07,3532.68) J19.6@3387.8,3532.68 ; J19.6@3366.14,3532.68 3443.82,3455 3675.24,3455 3730,3455 IC1.15@3930,3255
MISO1: IC1.11 J8/9.6 | length 419.5
  Top Layer w15.75: J8/9.6@4173.23,3511.02 cw(c4173.23,3458.75) 4210.19,3495.71 cw(c4247.16,3532.68) J8/9.6@4194.88,3532.68 ; J8/9.6@4173.23,3532.68 4330,3375.91 IC1.11@4330,3260.24
MOSI: J19.5 U1.12 | length 1203.7
  Bottom Layer w15.75: U1.12@3243.23,2653.11 ccw(c3206.27,2690.07) 3258.54,2690.07 ccw(c3310.82,2690.07) U1.12@3273.85,2653.11 ; U1.12@3258.54,2637.8 3258.54,3283.54 3318.74,3343.74 3318.74,3585.28 J19.5@3366.14,3632.68 ; J19.5@3344.49,3632.68 cw(c3292.21,3632.68) 3329.18,3595.71 cw(c3366.14,3558.75) J19.5@3366.14,3611.02
MOSI1: J8/9.5 U1.6 | length 1388.6
  Top Layer w15.75: U1.6@3858.54,2659.45 ccw(c3858.54,2711.72) 3895.51,2674.76 ; U1.6@3880.2,2637.8 cw(c3932.47,2637.8) 3895.51,2674.76 ; J8/9.5@4151.57,3632.68 cw(c4099.3,3632.68) 4136.26,3595.71 cw(c4173.23,3558.75) J8/9.5@4173.23,3611.02 ; J8/9.5@4173.23,3632.68 4125,3584.45 4125,3495 4280,3340 4280,3175 4180,3075 4180,2920 3960,2700 3920.75,2700 3895.51,2674.76
NetC8_1: C8.1 C9.1 IC6.1 X1.1 | length 1214
  Bottom Layer w39.37: IC6.1@60,1505 448.54,1505 ; X1.1@395,1025 395,1165 490,1260 490,1505 450,1505 ; C8.1@480.54,1491.64 ccw(c450,1463.41) 450,1505 ; C8.1@480.54,1518.36 cw(c450,1546.59) 450,1505 ; C8.1@480.86,1491.31 ccw(c448.55,1460.03) 448.55,1505 ; C8.1@480.86,1518.69 cw(c448.55,1549.97) 448.55,1505 ; C8.1@481.08,1491.08 ccw(c447.48,1457.48) 447.48,1505 ccw(c447.48,1552.52) C8.1@481.08,1518.92 ; 490,1445.4 cw(c554.6,1445.4) C8.1@508.92,1491.08
NetD2_1: "MIDI IN1.5" D2.1 IC4.3 J13.3 | length 1270.2
  Bottom Layer w23.62: 820.25,469.36 ccw(c764,525.61) 843.54,525.61 ; D2.1@882.28,666.46 cw(c839.51,666.46) 869.76,636.21 cw(c900,605.97) D2.1@900,648.74 ; D2.1@900,684.17 ccw(c900,726.94) 930.24,696.7 ccw(c960.49,666.46) D2.1@917.72,666.46 ; J13.3@931.02,148.87 ccw(c900.77,179.11) 943.54,179.11 ccw(c986.31,179.11) J13.3@956.07,148.87 ; J13.3@943.54,136.34 943.54,236.46 846.69,333.31 846.69,442.91 843.54,446.06 843.54,610 1018.54,785 IC4.3@1195,785 ; IC4.3@1182.47,772.47 ccw(c1152.23,742.23) 1152.23,785 ccw(c1152.23,827.77) IC4.3@1182.47,797.53
NetD2_2: D2.2 IC4.2 R20.1 | length 584.6
  Bottom Layer w23.62: D2.2@900,973.54 1023.54,973.54 R20.1@1025,975 ; D2.2@912.53,961.02 cw(c942.77,930.77) 942.77,973.54 cw(c942.77,1016.31) D2.2@912.53,986.07 ; 983.46,973.54 ccw(c983.46,1016.54) R20.1@1013.86,986.14 ; 990.5,973.54 cw(c990.5,940.5) R20.1@1013.86,963.86 ; R20.1@1025,959.25 cw(c1025,921.23) 1051.88,948.12 cw(c1078.77,975) R20.1@1040.75,975 ; R20.1@1026.46,973.54 1115,885 IC4.2@1195,885 ; IC4.2@1182.47,872.47 ccw(c1152.23,842.23) 1152.23,885 ccw(c1152.23,927.77) IC4.2@1182.47,897.53
NetD3_1: "MIDI IN2.5" D3.1 IC5.3 J21.3 | length 1324.1
  Bottom Layer w23.62: D3.1@2249.8,659.8 2466.69,442.91 2466.69,348.31 2563.54,251.46 J21.3@2563.54,136.34 ; D3.1@2250,643.74 cw(c2250,605.44) 2277.08,632.52 ; D3.1@2250,679.17 ccw(c2250,725.46) 2282.73,692.73 ; D3.1@2250.73,660.73 2390,800 IC5.3@2595,800 ; 2279.21,689.21 ccw(c2306.97,661.46) 2267.72,661.46 ccw(c2314.96,661.46) 2281.55,628.05 ; J21.3@2551.02,148.87 ccw(c2520.77,179.11) 2563.54,179.11 ccw(c2606.31,179.11) J21.3@2576.07,148.87 ; IC5.3@2582.47,787.47 ccw(c2552.23,757.23) 2552.23,800 ccw(c2552.23,842.77) IC5.3@2582.47,812.53
NetD3_2: D3.2 IC5.2 R25.1 | length 627.8
  Bottom Layer w23.62: D3.2@2250,970 2415,970 2485,900 IC5.2@2595,900 ; D3.2@2262.53,956.02 cw(c2296.29,922.26) 2296.29,970 ; D3.2@2262.53,981.07 ccw(c2289.25,1007.8) 2289.25,970 ; R25.1@2398.86,958.86 ccw(c2371.98,931.98) 2371.98,970 ccw(c2371.98,1008.02) R25.1@2398.86,981.14 ; R25.1@2410,954.25 cw(c2410,904.16) 2445.42,939.58 ; R25.1@2425.75,970 ccw(c2451.7,970) 2433.35,951.65 ; IC5.2@2582.47,887.47 ccw(c2552.23,857.23) 2552.23,900 ccw(c2552.23,942.77) IC5.2@2582.47,912.53
NetEthernet_9: Ethernet.9 J26.2 | length 1165.7
  Bottom Layer w23.62: J26.2@3705,817.28 cw(c3705,774.51) 3735.24,804.76 cw(c3765.49,835) J26.2@3722.72,835 ; J26.2@3705,835 3850,690 3850,220 3915,155 3915,32.64 Ethernet.9@4009.06,-61.42 ; Ethernet.9@3988.98,-61.42 ccw(c3940.5,-61.42) 3974.78,-27.14 ccw(c4009.06,7.14) Ethernet.9@4009.06,-41.34
NetEthernet_11: Ethernet.11 J26.1 | length 1324.9
  Bottom Layer w23.62: J26.1@3805,817.28 cw(c3805,774.51) 3835.24,804.76 cw(c3865.49,835) J26.1@3822.72,835 ; J26.1@3805,835 3900.08,739.92 3900.08,424.92 4215,110 4259.29,110 Ethernet.11@4430.71,-61.42 ; Ethernet.11@4410.63,-61.42 ccw(c4362.16,-61.42) 4396.43,-27.14 ccw(c4430.71,7.14) Ethernet.11@4430.71,-41.34
NetIC1_12: IC1.12 J8/9.7 J8/9.8 | length 684
  Top Layer w15.75: J8/9.8@4057.92,3517.37 cw(c4020.95,3480.4) 4073.23,3480.4 cw(c4125.5,3480.4) J8/9.8@4088.54,3517.37 ; J8/9.8@4057.92,3547.99 ccw(c4020.95,3584.95) 4073.23,3584.95 ccw(c4125.5,3584.95) J8/9.8@4088.54,3547.99 ; J8/9.7@4057.92,3617.37 cw(c4020.95,3580.4) 4073.23,3580.4 cw(c4125.5,3580.4) J8/9.7@4088.54,3617.37 ; 4073.23,3411.77 IC1.12@4230,3255 ; 4073.23,3416.77 J8/9.8@4073.23,3532.68 J8/9.7@4073.23,3632.68
NetIC1_13: IC1.13 J8/9.10 | length 424.7
  Top Layer w15.75: J8/9.10@3957.92,3517.37 cw(c3920.95,3480.4) 3973.23,3480.4 cw(c4025.5,3480.4) J8/9.10@3988.54,3517.37 ; J8/9.10@3973.23,3532.68 3973.23,3411.77 IC1.13@4130,3255
NetIC1_14: IC1.14 J8/9.9 | length 527.4
  Top Layer w15.75: J8/9.9@3951.57,3632.68 cw(c3899.3,3632.68) 3936.26,3595.71 cw(c3973.23,3558.75) J8/9.9@3973.23,3611.02 ; J8/9.9@3973.23,3632.68 3920,3579.45 3920,3365 IC1.14@4030,3255
NetIC1_16: IC1.16 J19.7 J19.8 | length 1025.2
  Top Layer w15.75: J19.8@3250.83,3547.99 ccw(c3213.87,3584.95) 3266.14,3584.95 ccw(c3318.42,3584.95) J19.8@3281.45,3547.99 ; J19.7@3250.83,3617.37 cw(c3213.87,3580.4) 3266.14,3580.4 cw(c3318.42,3580.4) J19.7@3281.45,3617.37 ; J19.8@3266.14,3511.02 cw(c3266.14,3458.75) 3303.11,3495.71 cw(c3340.07,3532.68) J19.8@3287.8,3532.68 ; J19.7@3266.14,3632.68 J19.8@3266.14,3532.68 3383.82,3415 3670,3415 IC1.16@3830,3255
NetIC1_17: IC1.17 J19.10 | length 761
  Top Layer w15.75: J19.10@3166.14,3511.02 cw(c3166.14,3458.75) 3203.11,3495.71 cw(c3240.07,3532.68) J19.10@3187.8,3532.68 ; J19.10@3166.14,3532.68 3318.82,3380 3605,3380 IC1.17@3730,3255
NetIC1_18: IC1.18 J19.9 | length 859.5
  Top Layer w15.75: J19.9@3144.49,3632.68 cw(c3092.21,3632.68) 3129.18,3595.71 cw(c3166.14,3558.75) J19.9@3166.14,3611.02 ; J19.9@3166.14,3632.68 3110,3576.54 3110,3500 3275,3335 3550,3335 IC1.18@3630,3255
NetIC4_7: IC4.7 R19.2 | length 330.6
  Bottom Layer w23.62: IC4.7@1495,885 1575,885 R19.2@1662.5,972.5 ; IC4.7@1507.53,872.47 cw(c1537.77,842.23) 1537.77,885 cw(c1537.77,927.77) IC4.7@1507.53,897.53 ; 1634.58,944.58 ccw(c1599.16,980) R19.2@1649.25,980 ; 1646.65,956.65 cw(c1665,938.3) R19.2@1665,964.25
NetIC5_7: IC5.7 R24.2 | length 350
  Bottom Layer w23.62: IC5.7@2895,900 3005,900 R24.2@3085,980 ; IC5.7@2907.53,887.47 cw(c2937.77,857.23) 2937.77,900 cw(c2937.77,942.77) IC5.7@2907.53,912.53 ; R24.2@3069.25,980 cw(c3031.23,980) 3058.12,953.12 cw(c3085,926.23) R24.2@3085,964.25
NetJ1_1: J1.1 X1.3 | length 617.3
  Bottom Layer w39.37: J1.1@15,935 495,935 585,1025 X1.3@595,1025
NetJ1_2: J1.2 X1.2 | length 384.1
  Bottom Layer w39.37: J1.2@15,835 385,835 X1.2@395,825
NetJ3_11: J3.11 R2.4 | length 496
  Top Layer w15.75: R2.4@3834.25,1065 3882.4,1113.15 3882.4,1302.4 J3.11@3935,1355 ; R2.4@3834.25,1086.65 ccw(c3834.25,1138.93) 3871.22,1101.96 ccw(c3908.18,1065) R2.4@3855.91,1065 ; J3.11@3913.35,1355 cw(c3861.07,1355) 3898.04,1318.04 cw(c3935,1281.07) J3.11@3935,1333.35
NetJ3_17: J3.17 R2.3 | length 495.3
  Top Layer w15.75: J3.17@3635,1333.35 cw(c3635,1281.07) 3671.96,1318.04 cw(c3708.93,1355) J3.17@3656.65,1355 ; J3.17@3635,1355 3687.6,1302.4 3687.6,1111.65 R2.3@3734.25,1065 ; R2.3@3712.6,1065 ccw(c3660.32,1065) 3697.29,1101.96 ccw(c3734.25,1138.93) R2.3@3734.25,1086.65
NetJ3_19: J3.19 R2.2 | length 495.3
  Top Layer w15.75: J3.19@3535,1333.35 cw(c3535,1281.07) 3571.96,1318.04 cw(c3608.93,1355) J3.19@3556.65,1355 ; J3.19@3535,1355 3582.4,1307.6 3582.4,1232.6 3634.25,1180.75 R2.2@3634.25,1065 ; R2.2@3618.94,1080.31 ccw(c3581.98,1117.28) 3634.25,1117.28 ccw(c3686.53,1117.28) R2.2@3649.56,1080.31
NetJ12_1: "MIDI OUT1.4" J12.1 R22.1 | length 700.7
  Bottom Layer w23.62: J12.1@1941.02,158.87 ccw(c1910.77,189.11) 1953.54,189.11 ccw(c1996.31,189.11) J12.1@1966.07,158.87 ; J12.1@1953.54,146.34 1953.54,243.54 2050.39,340.39 2050.39,442.91 R22.1@2050.39,680 ; R22.1@2038.86,668.86 cw(c2011.03,641.03) 2050.39,641.03 ; 2050.39,642.93 cw(c2087.07,642.93) R22.1@2061.14,668.86
NetJ12_3: "MIDI OUT1.5" J12.3 R21.2 | length 828
  Bottom Layer w23.62: J12.3@1741.02,158.87 ccw(c1710.77,189.11) 1753.54,189.11 ccw(c1796.31,189.11) J12.3@1766.07,158.87 ; J12.3@1753.54,146.34 1753.54,231.46 1656.69,328.31 1656.69,442.91 1692.91,442.91 R21.2@1925,675 ; 1894.58,644.58 ccw(c1859.16,680) R21.2@1909.25,680 ; 1906.65,656.65 cw(c1925,638.3) R21.2@1925,664.25
NetJ13_1: "MIDI IN1.4" J13.1 R20.2 | length 862.1
  Bottom Layer w23.62: R20.2@1013.86,663.86 cw(c986.98,636.98) 1025,636.98 cw(c1063.02,636.98) R20.2@1036.14,663.86 ; R20.2@1025,675 1025,543.54 1125.63,442.91 1240.39,442.91 1240.39,330.39 1143.54,233.54 J13.1@1143.54,136.34 ; J13.1@1131.02,148.87 ccw(c1100.77,179.11) 1143.54,179.11 ccw(c1186.31,179.11) J13.1@1156.07,148.87
NetJ17_2: J17.2 USB.1 | length 306.7
  Top Layer w23.62: USB.1@363.84,449.86 ccw(c330.23,483.47) 377.76,483.47 ccw(c425.28,483.47) USB.1@391.68,449.86 ; J17.2@367.85,587.18 cw(c343.94,563.27) 377.76,563.27 ; USB.1@377.76,435.94 377.76,597.09 J17.2@380.38,599.71 ; 377.76,550.61 cw(c429.48,550.61) J17.2@392.91,587.18
NetJ20_1: "MIDI OUT2.4" J20.1 R27.1 | length 744
  Bottom Layer w23.62: J20.1@3561.02,143.87 ccw(c3530.77,174.11) 3573.54,174.11 ccw(c3616.31,174.11) J20.1@3586.07,143.87 ; J20.1@3573.54,131.34 3573.54,223.54 3670.39,320.39 3670.39,442.91 3590,523.31 R27.1@3590,675 ; R27.1@3578.86,663.86 cw(c3551.98,636.98) 3590,636.98 cw(c3628.02,636.98) R27.1@3601.14,663.86
NetJ20_3: "MIDI OUT2.5" J20.3 R26.2 | length 749
  Bottom Layer w23.62: R26.2@3333.86,673.86 cw(c3306.98,646.98) 3345,646.98 cw(c3383.02,646.98) R26.2@3356.14,673.86 ; R26.2@3345,685 3345,511.22 3276.69,442.91 3276.69,318.31 3373.54,221.46 J20.3@3373.54,131.34 ; J20.3@3361.02,143.87 ccw(c3330.77,174.11) 3373.54,174.11 ccw(c3416.31,174.11) J20.3@3386.07,143.87
NetJ21_1: "MIDI IN2.4" J21.1 R25.2 | length 1018.1
  Bottom Layer w23.62: R25.2@2410,654.25 cw(c2410,616.23) 2436.88,643.12 cw(c2463.77,670) R25.2@2425.75,670 ; R25.2@2410,670 2637.09,442.91 2860.39,442.91 2860.39,335.39 2763.54,238.54 J21.1@2763.54,136.34 ; J21.1@2751.02,148.87 ccw(c2720.77,179.11) 2763.54,179.11 ccw(c2806.31,179.11) J21.1@2776.07,148.87
NetP1_3: P1.3 R13.1 | length 618.9
  Bottom Layer w15.75: P1.3@440.51,3660.51 cw(c393.47,3613.47) 460,3613.47 cw(c526.53,3613.47) P1.3@479.49,3660.51 ; P1.3@460,3680 460,3410 R13.1@580,3290 ; R13.1@560.31,3290 ccw(c512.79,3290) 546.4,3323.6 ccw(c580,3357.21) R13.1@580,3309.68
NetR13_2: R13.2 T1.2 | length 435
  Bottom Layer w23.62: T1.2@367.69,3202.69 580,2990.39 R13.2@580,2990 ; T1.2@370,3185.31 cw(c370,3148.93) 395.73,3174.66 ; T1.2@389.69,3205 ccw(c448.34,3205) 406.87,3163.52 ; 552.84,3017.55 cw(c525.3,2990) R13.2@564.25,2990 ; 553.78,3016.61 ccw(c580,3042.83) R13.2@580,3005.75
P0.0: R26.1 U1.9 | length 1996.6
  Top Layer w15.75: R26.1@3325.38,986.64 ccw(c3289.64,989.63) 3315,1015 ; R26.1@3343.36,1004.62 cw(c3340.37,1040.36) 3315,1015 ; R26.1@3345,985 3315,1015 ; U1.9@3543.23,2622.48 cw(c3506.27,2585.52) 3558.54,2585.52 cw(c3610.82,2585.52) U1.9@3573.85,2622.48 ; U1.9@3558.54,2637.8 3558.54,2138.54 3211.14,1791.14 3211.14,1503.86 3315,1400 3315,1015
P0.1: IC5.6 R23.1 U1.10 | length 2519.5
  Top Layer w15.75: R23.1@3180.32,990 ccw(c3132.79,990) 3166.4,1023.6 ccw(c3200,1057.21) R23.1@3200,1009.69 ; R23.1@3200,990 3082.6,1107.4 3082.6,1457.6 3110,1485 3110,1790 3458.54,2138.54 U1.10@3458.54,2637.8 ; U1.10@3443.23,2622.48 cw(c3406.27,2585.52) 3458.54,2585.52 cw(c3510.82,2585.52) U1.10@3473.85,2622.48
  Bottom Layer w23.62: IC5.6@2895,800 3010,800 R23.1@3200,990 ; IC5.6@2907.53,787.47 cw(c2937.77,757.23) 2937.77,800 cw(c2937.77,842.77) IC5.6@2907.53,812.53 ; R23.1@3184.25,990 cw(c3146.23,990) 3173.12,963.12 cw(c3200,936.23) R23.1@3200,974.25
P0.2: J5B.10 U1.21 | length 1059.1
  Top Layer w15.75: U1.21@2343.23,2653.11 ccw(c2306.27,2690.07) 2358.54,2690.07 ccw(c2410.82,2690.07) U1.21@2373.85,2653.11 ; J5B.10@2343.74,3517.37 cw(c2308.01,3481.64) 2358.54,3481.64 ; U1.21@2358.54,2637.8 J5B.10@2358.54,3532.68 ; 2358.54,3479.17 cw(c2412.57,3479.17) J5B.10@2374.37,3517.37